# Altium PCB pcb_rev2.PcbDoc
Units mil, origin at the board's own origin, x right, y up, seen from the top; angles counter-clockwise.
Board outline 1100 x 1600 mil, 4 copper layers (Top Layer, Power, Ground, Bottom Layer), stack 65.354 mil thick; 19 components, 21 nets, 79 pads, 19 vias.
Unrouted connection lines stored in the file: 12.
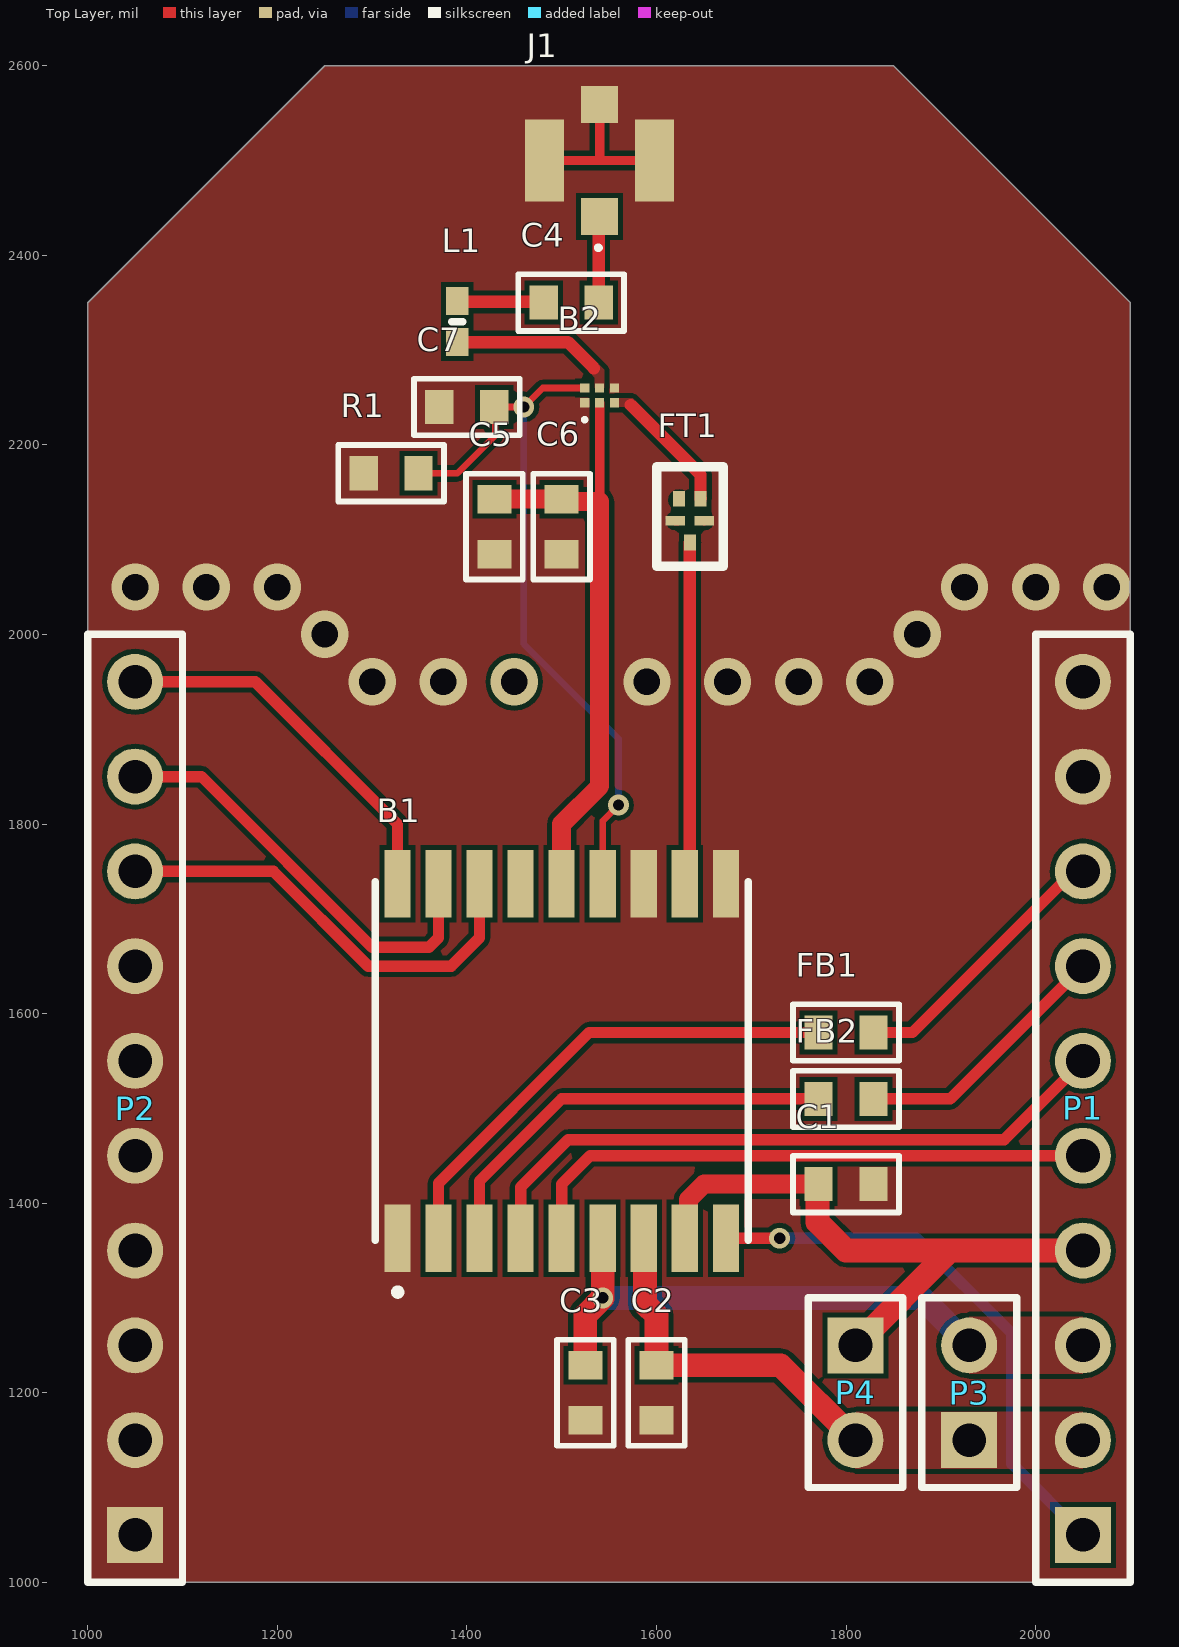
[diagram p0: Top Layer view]
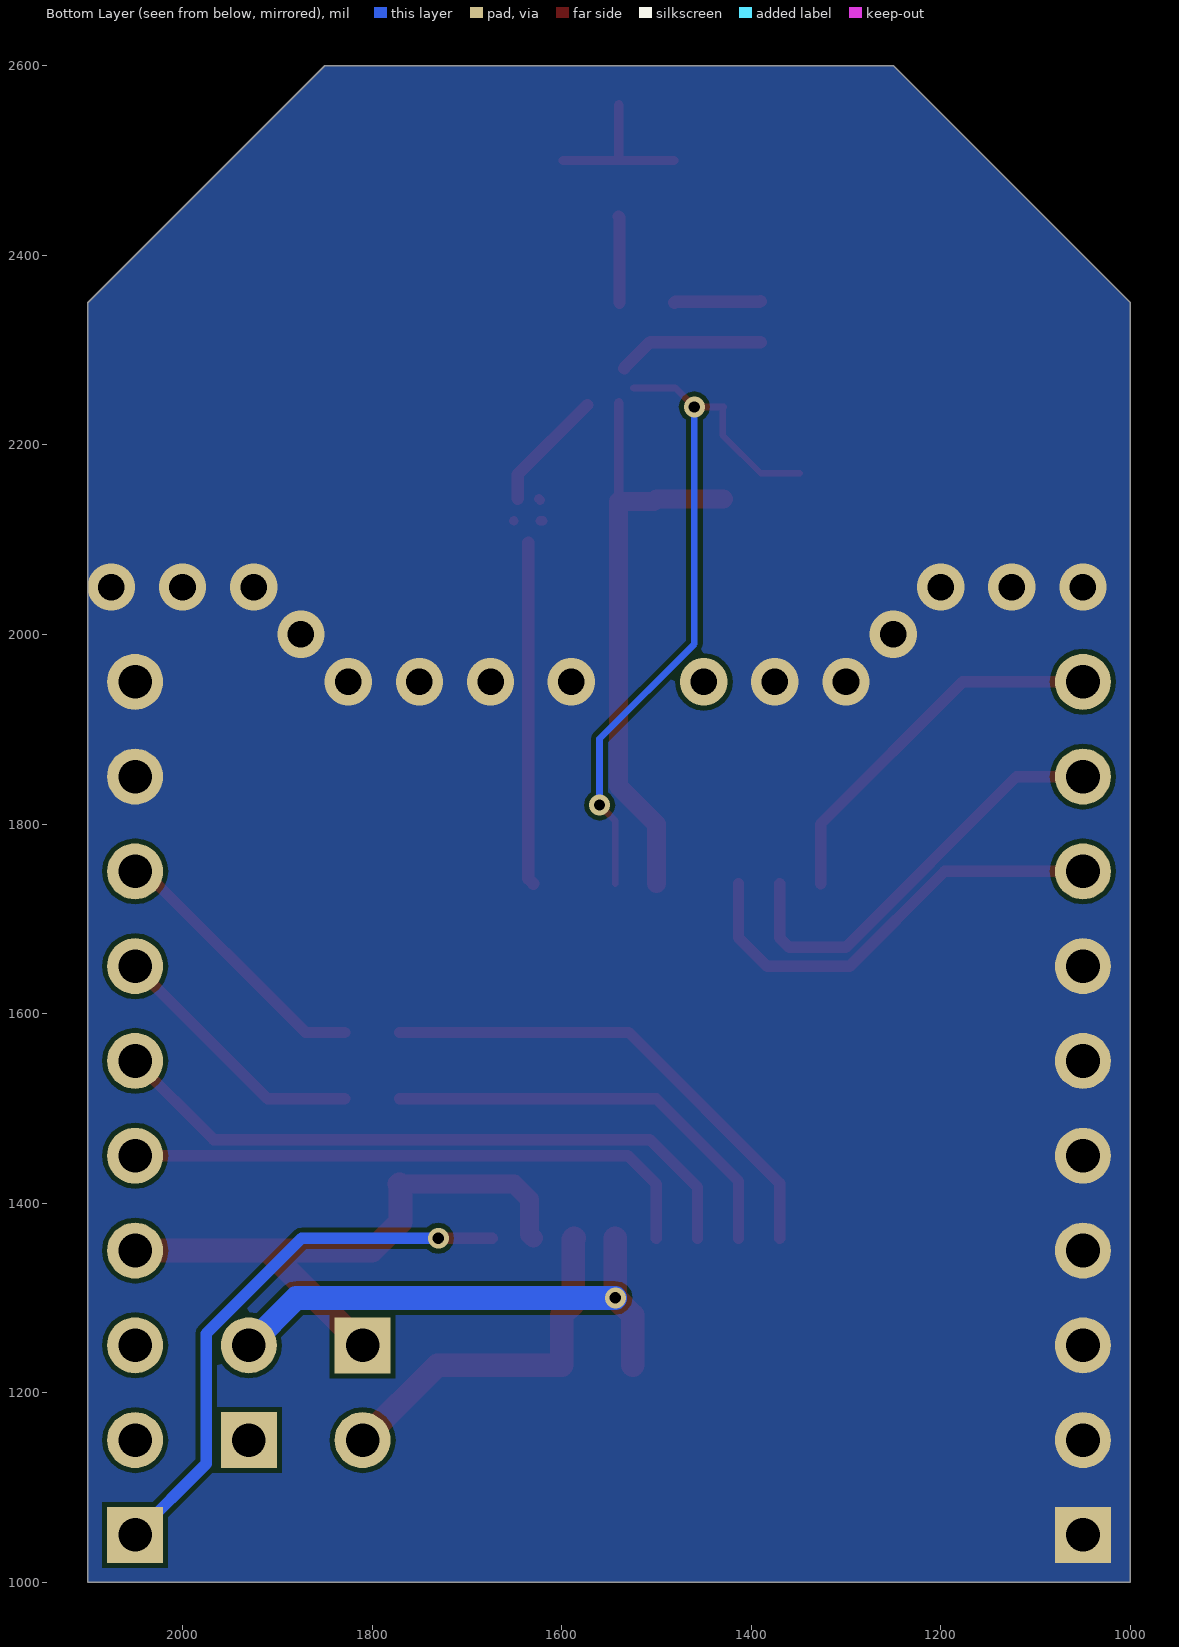
[diagram p1: Bottom Layer view, seen from below]
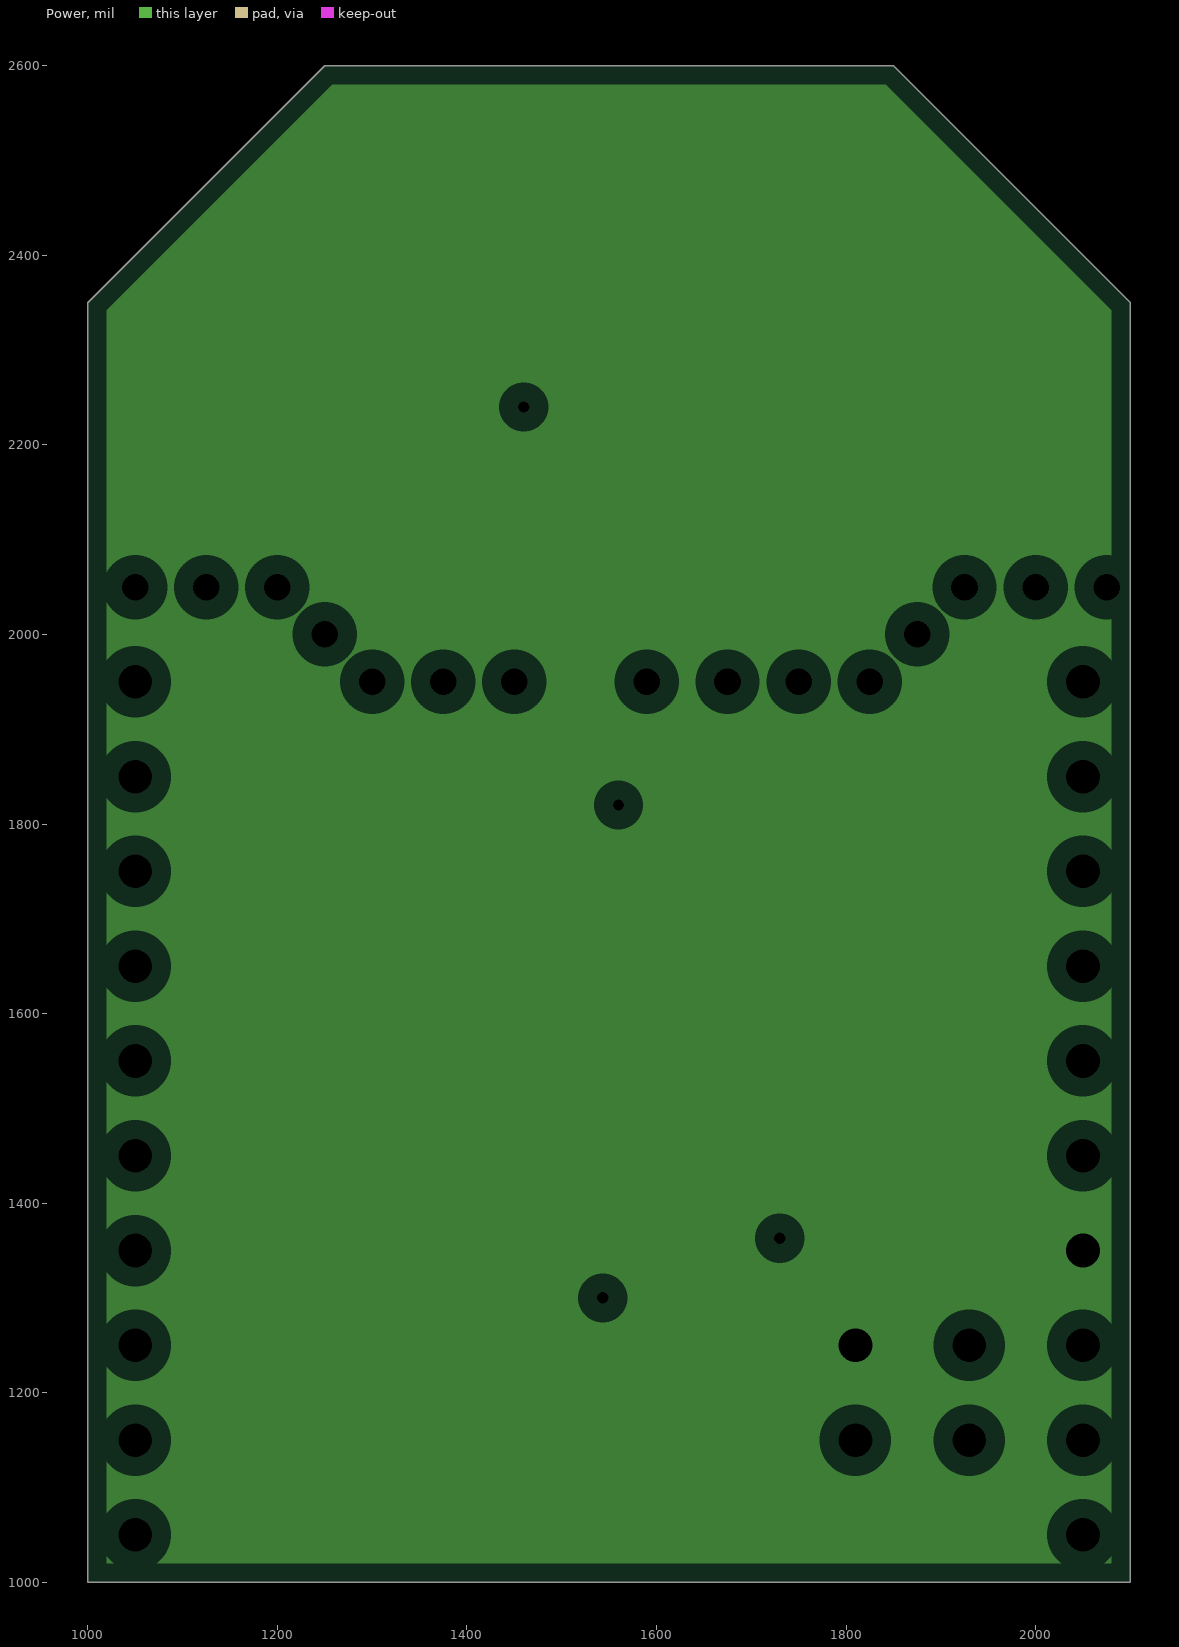
[diagram p2: Power, clearances drawn from the general rule]
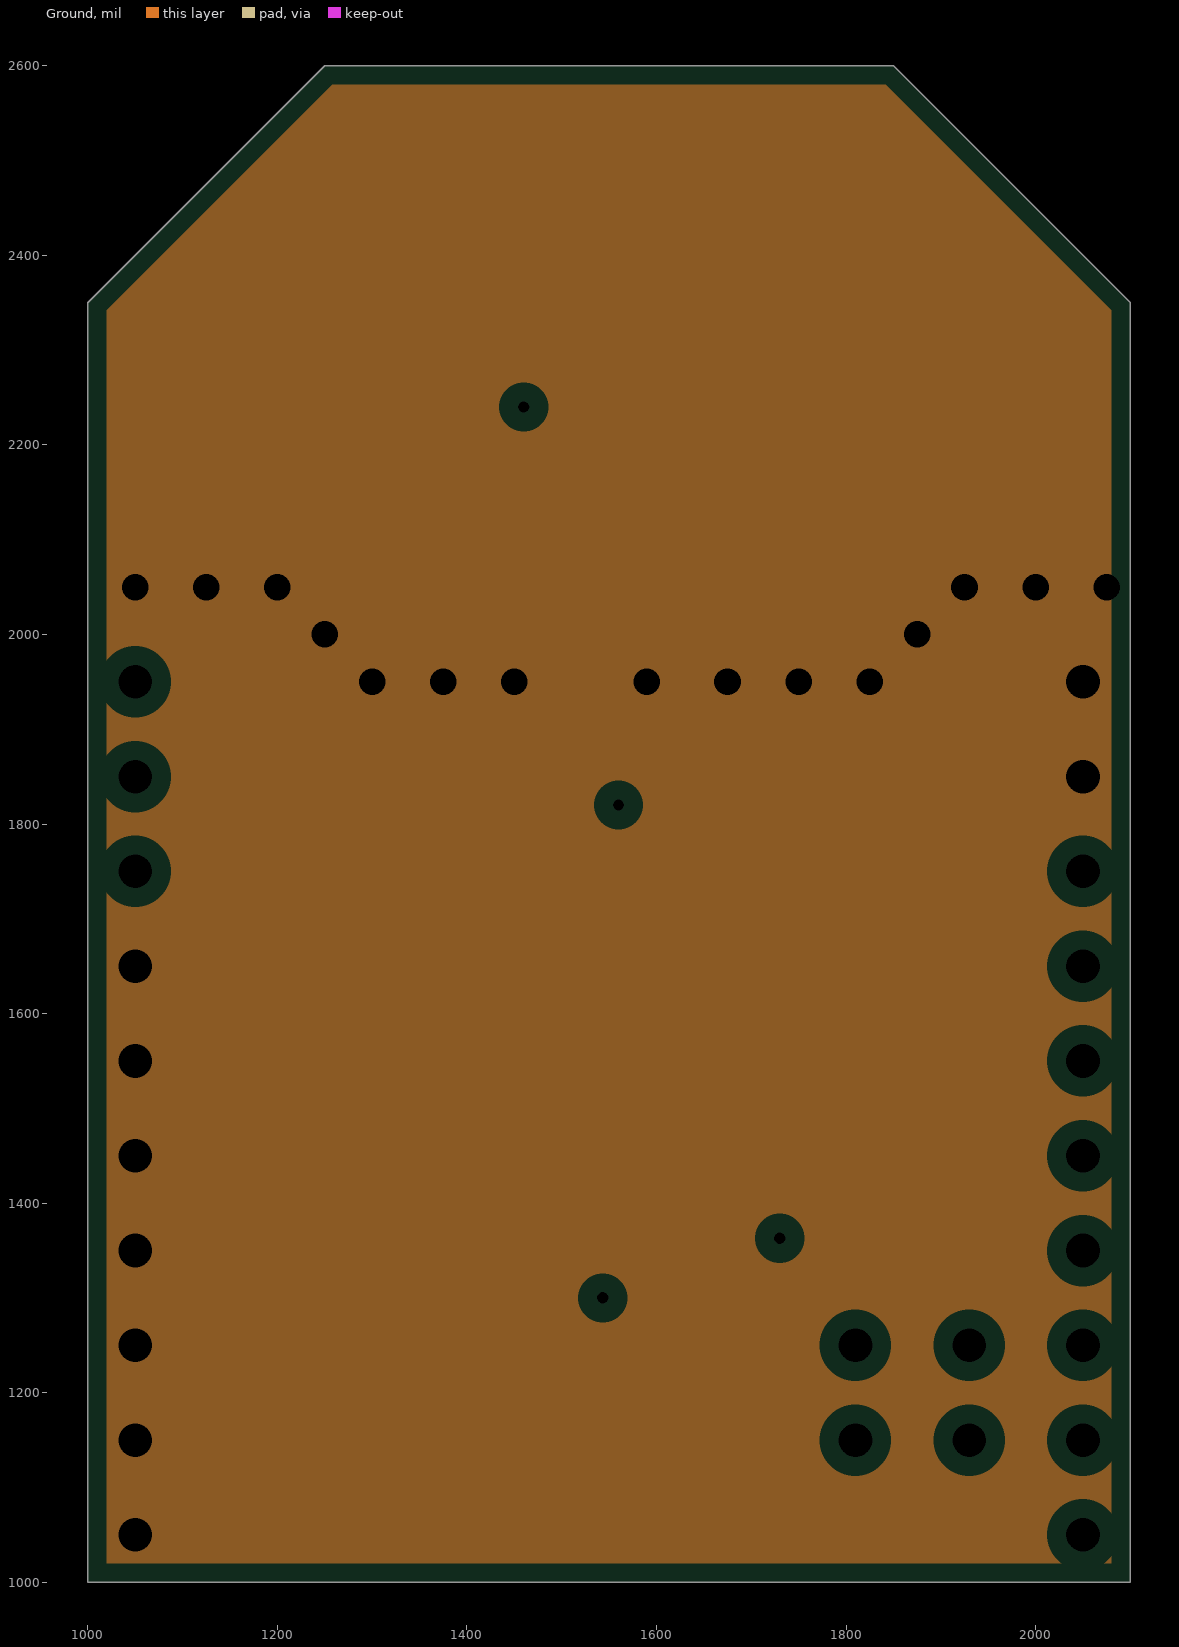
[diagram p3: Ground, clearances drawn from the general rule]
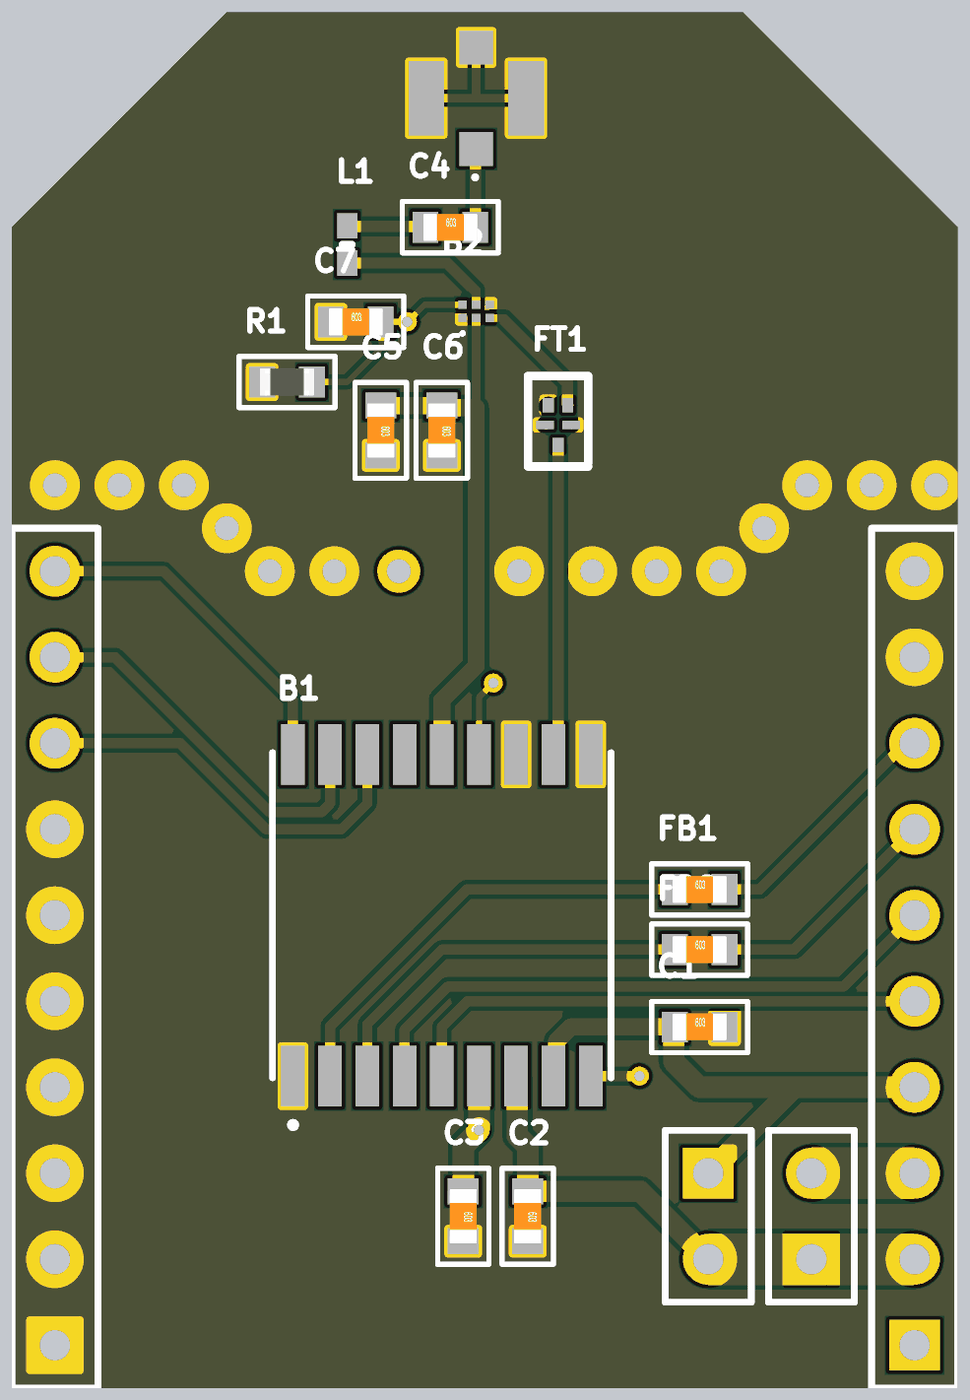
[diagram p4: 3D render of the assembled board from above, using the file's embedded part models]

## Layer stack, top to bottom
Top Solder: solder mask 0.4, Solder Resist, Dk 3.5
Top Layer: signal copper 1.3779
Dielectric 2: prepreg 7.2835, PP-006, Dk 4.1
Power: plane copper 1.3779, net VCC
Dielectric 1: dielectric 45.2756, FR-4, Dk 4.8
Ground: plane copper 1.3779, net GND
Dielectric 3: prepreg 7.2835, PP-006, Dk 4.1
Bottom Layer: signal copper 1.3779
Bottom Solder: solder mask 0.4, Solder Resist, Dk 3.5

## Board outline
1000,1000 1000,2350 1250,2600 1850,2600 2100,2350 2100,1000

## Design rules (kind name [scope] priority, off if disabled: settings)
Clearance [All] p1: gap=5 ignorepadtopadclearanceinfootprint=FALSE
HoleSize [All] p1: absolutevalues=TRUE maxlimit=100 minlimit=12 maxpercent=80.000 minpercent=20.000
MinimumSolderMaskSliver [All] p1: minsoldermaskwidth=0
PlaneClearance [All] p1: clearance=20
PlaneConnect [All] p1: planeconnectstyle=Relief reliefexpansion=20 reliefentries=4 reliefconductorwidth=10 reliefairgap=10
PolygonConnect [All] p1: connectstyle=Direct reliefconductorwidth=10 reliefentries=4 polygonreliefangle="90 Angle" airgapwidth=10
RoutingVias [All] p1: holewidth=12 width=22 viastyle="Through Hole" minholewidth=12 minwidth=22 maxholewidth=25 maxwidth=50
SilkToSilkClearance [All] p1: silktosilkclearance=0
SilkToSolderMaskClearance [IsPad] p1: minsilkscreentomaskgap=0 clearancetoexposedcopper=TRUE
SolderMaskExpansion [All] p1: expansion=4
Width "50_OHM WIDTH" [InNetClass('50 OHM')] p1: maxlimit=13.09 minlimit=13.09 preferedwidth=13.09 impedanceprofiledriven=TRUE impedanceprofileid={651FCEE8-75AD-49C9-A953-510C2A1737B5} minimp=50.000000 maximp=50.000000 favimp=50.000000
Width "power trace" [InNetClass('POWER')] p2: maxlimit=25 minlimit=10 preferedwidth=20
Width [All] p3: maxlimit=12 minlimit=7 preferedwidth=10
24 further rules are at their usual default settings.

## Classes and differential pairs
net class POWER: V_BCKP VCC VCC_IO VCC_RF
net class "50 OHM": NetB2_3 NetB2_5 NetC4_1 NetC4_2 RF_IN

## Components (designator, comment, footprint, x,y, rotation, side; value= is the part's Value field where it differs from the comment)
B1 "MAX-M8C-0-10" MAX-M8 1500,1550 r270 top
B2 "BGA725L6E6327FTSA1" BGS12SN6E6327XTSA1 1540,2245.24 r90 top
C1 "C0603" 0603CAP 1800,1420 r0 top value=0.1uF
C2 "C0603" 0603CAP 1600,1200 r270 top value=0.1uF
C3 "C0603" 0603CAP 1525,1200 r270 top value=0.1uF
C4 "C0603" 0603CAP 1510,2350 r0 top value=1nF
C5 "C0603" 0603CAP 1429,2113.74 r270 top value=0.1uF
C6 "C0603" 0603CAP 1500,2113.74 r270 top value=10pF
C7 "C0603" 0603CAP 1400,2240 r0 top value=10pF
FB1 "FB0603" 0603CAP 1800,1580 r0 top
FB2 "FB0603" 0603CAP 1800,1510 r0 top
FT1 "AFS14A34-1588.66-T3" AFS14A34-1588.66-T3 1635.26,2096.87 r90 top
J1 "73412-0110" 73412-0110 1540,2500 r0 top
L1 "LQW15AN7N5G00D" INDC1005X55N 1390,2330 r90 top
P1 "Header 10" HDR1X10 2050,1050 r90 top locked
P2 "Header 10" HDR1X10 1050,1050 r90 top locked
P3 "Header 2" HDR1X2 1930,1150 r90 top
P4 "Header 2" HDR1X2 1810,1250 r270 top
R1 "R0603" 0603RES 1320,2170 r0 top value=10k'

## Footprints (in the part's own frame and the unit in brackets; to place one, negate y for a bottom-side part, rotate by r counter-clockwise, add the part's x,y. Pads: shape width x height; smd on the part's side, far side on the other; paste and mask are expansions set on the pad)
0603CAP [mil] "Chip Capacitor; Body 1.6 x 0.8 mm (LxW typ)"
  rect 30x35.98 smd: 1(-29,0) 2(29,0)
  silkscreen extent -56,-30 56,30, body extent -56,-30 56,30, height 12
0603RES [mil] "Chip Resistor; Body 1.6 x 0.8 mm (LxW typ)"
  rect 30x35.98 smd: 1(-29,0) 2(29,0)
  silkscreen extent -56,-30 56,30, body extent -56,-30 56,30, height 15
73412-0110 [mm]
  rect 1x1 smd: 1(0,-1.5) 2(0,1.5)
  rect 1.05x2.2 smd: 3(-1.475,0) 4(1.475,0)
  silkscreen extent -0.05,-2.35 -0.01,-2.32
AFS14A34-1588.66-T3 [mm] "ABRACON SAW FILTER"
  rect 0.425x0.325 smd: A(1.175,-0.288) C(0,0) E(1.175,0.288)
  rect 0.25x0.525 smd: B(0.587,-0.387) D(0.587,0.387)
  silkscreen extent -0.64,-0.89 2.03,0.89, body extent -0.9,-0.75 1.9,0.75, height 0.7
BGS12SN6E6327XTSA1 [mm]
  rect 0.25x0.25 smd: 1(-0.025,0.4) 2(-0.025,0) 3(-0.025,-0.4) 4(0.375,-0.4) 5(0.375,0) 6(0.375,0.4)
  silkscreen extent -0.53,0.35 -0.43,0.45, body extent -0.25,-0.63 0.6,0.63, height 0.7
HDR1X2 [mm] "Connector; Header; 2 Position"
  rect 1.5x1.5 hole 0.9: 1(0,0)
  round 1.5 hole 0.9: 2(2.54,0)
  silkscreen extent -1.27,-1.27 3.81,1.27
HDR1X10 [mm] "Connector; Header; 10 Position"
  rect 1.5x1.5 hole 0.9: 1(0,0)
  round 1.5 hole 0.9: 2(2.54,0) 3(5.08,0) 4(7.62,0) 5(10.16,0) 6(12.7,0) 7(15.24,0) 8(17.78,0) 9(20.32,0) 10(22.86,0)
  silkscreen extent -1.27,-1.27 24.13,1.27
INDC1005X55N [mm]
  rect 0.75x0.6 smd: 1(-0.55,0) 2(0.55,0)
  silkscreen extent 0,-0.15 0,0.15
MAX-M8 [mm]
  rect 1.8x0.7 smd: 1(4.75,-4.4) 2(4.75,-3.3) 3(4.75,-2.2) 4(4.75,-1.1) 5(4.75,0) 6(4.75,1.1) 7(4.75,2.2) 8(4.75,3.3) 9(4.75,4.4) 10(-4.75,4.4) 11(-4.75,3.3) 12(-4.75,2.2) 13(-4.75,1.1) 14(-4.75,0) 15(-4.75,-1.1) 16(-4.75,-2.2) 17(-4.75,-3.3) 18(-4.75,-4.4)
  silkscreen extent -4.8,-5 6.27,5

## Part data
B1: "u-blox M8 concurrent GNSS module", Manufacturer_Name=U-Blox, Datasheet Link=https://www.u-blox.com/sites/default/files/MAX-M8-FW3_DataSheet_%28UBX-15031506%29.pdf, Manufacturer_Part_Number=MAX-M8C-0-10
B2: "INFINEON - BGA725L6E6327FTSA1 - RF AMP, 20DB, 1.615GHZ, 3.6V, TSLP-6", Manufacturer_Name=Infineon, Mouser Part Number=726-BGA725L6E6327FTS, Datasheet Link=https://www.infineon.com/dgdl/Infineon-BGA725L6-DS-v02_00-en.pdf?fileId=db3a30433784a0400137ef9a4d341f23, Manufacturer_Part_Number=BGA725L6E6327FTSA1, Mouser Price/Stock=https://www.mouser.com/Search/Refine.aspx?Keyword=726-BGA725L6E6327FTS
C1 C2 C3 C4 C5 C6 C7: "0603 Ceramic Chip Capacitor - Standard"
FB1 FB2: "0603 Multilayer Ferrite Power Bead", Manufacturer="KOA Speer", Manufacturer P/N=CZP1JFTTD121P, Resistance @ 100MHz=120, Price=0.15, Vendor=Mouser, Vendor P/N=660-CZP1JFTTD121P
FT1: "SAW FILTER", Manufacturer="Abracon LLC", COMPONENT LINK 1=https://abracon.com/Filters/SAW%20FILTERS/AFS14A34-1588.66-T3.pdf, DIGIKEY PN=535-13421-1-ND, MANUFACTURER PN=AFS14A34-1588.66-T3
J1: "50 Ohms, MCRF, PCB Vertical Jack Receptacle, SMT, 1.25mm Mounted Height", Manufacturer_Name=Molex, Mouser Part Number=538-73412-0110, RS Part Number=1676350, Allied_Number=70357960, Allied Price/Stock=https://www.alliedelec.com/molex-incorporated-73412-0110/70357960/, Datasheet Link=http://www.molex.com/pdm_docs/sd/734120110_sd.pdf, Manufacturer_Part_Number=73412-0110, Mouser Price/Stock=https://www.mouser.com/Search/Refine.aspx?Keyword=538-73412-0110, RS Price/Stock=http://uk.rs-online.com/web/p/products/1676350
L1: "Inductor SMD 0402 7.5nH 570mA Murata LQW15A Series Wire-wound SMD Inductor with a Ferrite Core, 0.0075 uH +/-2% 570mA Idc Q:25", Manufacturer_Name="Murata Electronics", Mouser Part Number=81-LQW15AN7N5G00D, RS Part Number=7926473P, Datasheet Link=http://uk.rs-online.com/web/p/products/7926473, Geometry.Height=0.55mm, Manufacturer_Part_Number=LQW15AN7N5G00D, Mouser Price/Stock=https://www.mouser.com/Search/Refine.aspx?Keyword=81-LQW15AN7N5G00D, RS Price/Stock=http://uk.rs-online.com/web/p/products/7926473P
P1 P2: "Header, 10-Pin", LatestRevisionDate=17-Jul-2002, LatestRevisionNote="Re-released for DXP Platform.", Publisher="Altium Limited"
P3 P4: "Header, 2-Pin", LatestRevisionDate=17-Jul-2002, LatestRevisionNote="Re-released for DXP Platform.", Publisher="Altium Limited"
R1: "0603 Chip Resistor - Standard"

## Via types
v1: diameter 50, hole 28, Top Layer to Bottom Layer, 15 vias
v2: diameter 22, hole 12, Top Layer to Bottom Layer, 4 vias

## Nets (pads, with @x,y where several pads share a name; then routed paths per layer and width w, separated by ;. In a path a pad name is that pad's centre, name@x,y a point inside that pad or via, vN(x,y) a via of type N, cw(c..) or ccw(c..) an arc to the next point about the centre after c; other vN are vias at no path point)
/RESET: B1.9 P1.1 | length 586.9
  Top Layer w12: B1.9 v2(1730,1362.99)
  Bottom Layer w12: v2(1730,1362.99) 1874.32,1362.99 1975,1262.31 1975,1125 P1.1
/SAFEBOOT: B1.18 P2.10 | length 401.9
  Top Layer w12: P2.10 1176.77,1950 1326.77,1800 B1.18
EXTINT: B1.5 P1.5 | length 619.4
  Top Layer w12: B1.5 1500,1420 1530,1450 P1.5
GND: B1.1 B1.10 B1.12 B2.1 B2.4 C1.2 C2.2 C3.2 C5.2 C6.2 C7.1 FT1.B FT1.D FT1.E J1.2 J1.3 J1.4 P1.9 P1.10 P2.1 P2.2 P2.3 P2.4 P2.5 P2.6 P2.7 R1.1 | length 179.8
  Top Layer w10: J1.3 1540,2500 ; J1.2 1540,2500 ; J1.4 1540,2500 ; FT1.D 1622.46,2120 FT1.D@1622.54,2120.08 ; FT1.E@1622.54,2141.73 FT1.E
  other v1: 1300,1950 1375,1950 1450,1950 1590,1950 1675,1950 1750,1950 1825,1950 1250,2000 1875,2000 1050,2050 1125,2050 1200,2050 1925,2050 2000,2050 2075,2050
LNA_EN: B1.13 B2.6 C7.2 R1.2 | length 781.4
  Top Layer w7: R1.2 1390,2170 1430,2210 C7.2@1430,2240 ; C7.2 C7.2@1430,2240 ; 1480,2260 v2(1460,2240) C7.2@1430,2240 ; 1481,2260 B2.6 ; B1.13 1543.31,1803.31 v2(1560,1820)
  Bottom Layer w7: v2(1460,2240) 1460,1990 1560,1890 v2(1560,1820)
NetB2_3: B2.3 FT1.A | length 129.4
  Top Layer w13.09: 1573,2242 1646.45,2168.55 1646.45,2143.28 FT1.A
NetB2_5: B2.5 L1.1 | length 155.3
  Top Layer w13.09: L1.1 1506.65,2308.35 1534,2281
NetC4_1: C4.1 L1.2 | length 91.7
  Top Layer w13.09: L1.2 1390.83,2350.83 1480.17,2350.83 C4.1
NetC4_2: C4.2 J1.1 | length 91.4
  Top Layer w13.09: C4.2 1539,2439.94 J1.1
RF_IN: B1.11 FT1.C | length 362.1
  Top Layer w13.09: B1.11 1635.11,1742.2 1635.11,2096.72 FT1.C
RX: FB2.2 P1.7 | length 279
  Top Layer w12: FB2.2 1910,1510 P1.7
RX_F: B1.3 FB2.1 | length 453.9
  Top Layer w12: B1.3 1413.39,1423.39 1500,1510 FB2.1
SCL: B1.17 P2.9 | length 455.7
  Top Layer w12: P2.9 1120,1850 1300,1670 1360,1670 1370.08,1680.08 B1.17
SDA: B1.16 P2.8 | length 474.2
  Top Layer w12: P2.8 1195.96,1750 1295.96,1650 1383.39,1650 1413.39,1680 B1.16
TIMEPULSE: B1.4 P1.6 | length 726.3
  Top Layer w7: P1.6 2059.96,1559.96 P1.6@2069.96,1559.96
  Top Layer w12: B1.4 1456.69,1416.69 1507,1467 1967,1467 P1.6
TX: FB1.2 P1.8 | length 291.4
  Top Layer w12: FB1.2 1870,1580 2040,1750 P1.8
TX_F: B1.2 FB1.1 | length 524.8
  Top Layer w12: B1.2 1370.08,1421.08 1529,1580 FB1.1
V_BCKP: B1.6 C3.1 P1.3 P3.2 | length 549
  Top Layer w25: C3.1 1525,1281.69 v2(1543.31,1300) B1.6
  Bottom Layer w25: v2(1543.31,1300) 1880,1300 P3.2
VCC: B1.8 C1.1 P1.4 P4.1 | length 660.6
  Top Layer w20: B1.8 1633.7,1366.77 1633.7,1403.7 1650,1420 C1.1
  Top Layer w25: C1.1 1770,1419 1770,1380 1800,1350 1910,1350 ; P4.1 1910,1350 ; P1.4 1910,1350
VCC_IO: B1.7 C2.1 P1.2 P3.1 P4.2 | length 382.3
  Top Layer w25: B1.7 1587.89,1361.71 1587.89,1293.8 1600,1281.69 C2.1 1731,1229 P4.2
VCC_RF: B1.14 B2.2 C5.1 C6.1 | length 635.9
  Top Layer w10: 1540,2140 B2.2
  Top Layer w20: C5.1 C6.1 1502.74,2140 1540,2140 1540,1840 1500,1800 B1.14
pads on no net: B1.15

## Polygon pours and split planes (outlines as drawn)
GND on Top Layer "GND_L01_P040" (solid, pour order 40): 1000,2350 1250,2600 1850,2600 2100,2350 2100,1000 1000,1000
NetB2_5 on Top Layer "NETB2_5_L01_P032" (solid, pour order 32): 1535,2260 1535,2271 1530,2276 1539,2285 1545,2279 1545,2260
NetB2_3 on Top Layer "NETB2_3_L01_P030" (solid, pour order 30): 1556,2249 1575,2249 1577,2247 1568,2238 1566,2240 1556,2240
V_BCKP on Top Layer "V_BCKP_L01_P028" (solid, pour order 28): 1930,1280 2050,1280 2050,1220 1930,1220
VCC_IO on Top Layer "VCC_IO_L01_P022" (solid, pour order 22): 1810,1180 2050,1180 2050,1120 1810,1120
GND on Bottom Layer "GND_L04_P038" (solid, pour order 38): 1000,2350 1250,2600 1850,2600 2100,2350 2100,1000 1000,1000
VCC on Power (split plane): 2079.9,2341.68 2079.9,1020.1 1020.1,1020.1 1020.1,2341.68 1258.32,2579.9 1841.68,2579.9
GND on Ground (split plane): 2079.9,2341.68 2079.9,1020.1 1020.1,1020.1 1020.1,2341.68 1258.32,2579.9 1841.68,2579.9

## Silkscreen, mask and mechanical layers (free items; w line width, h text height)
Mechanical 1:
  the board outline again, w10